# EAGLE board PANNEL_Final (EAGLE 8.6.0)
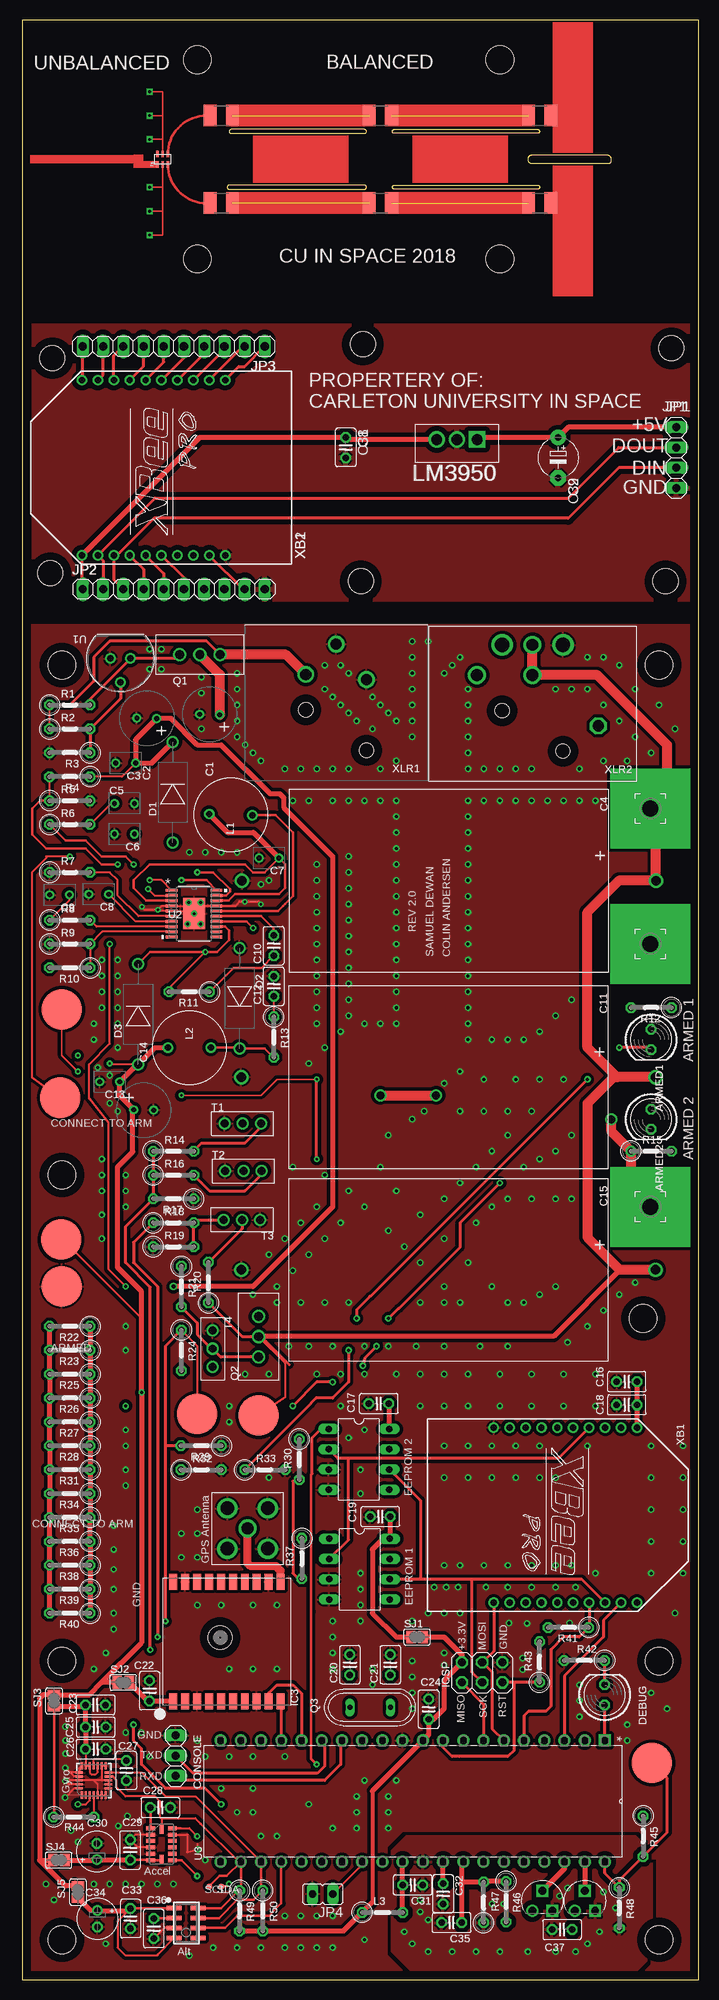
[diagram p0: board, top side]
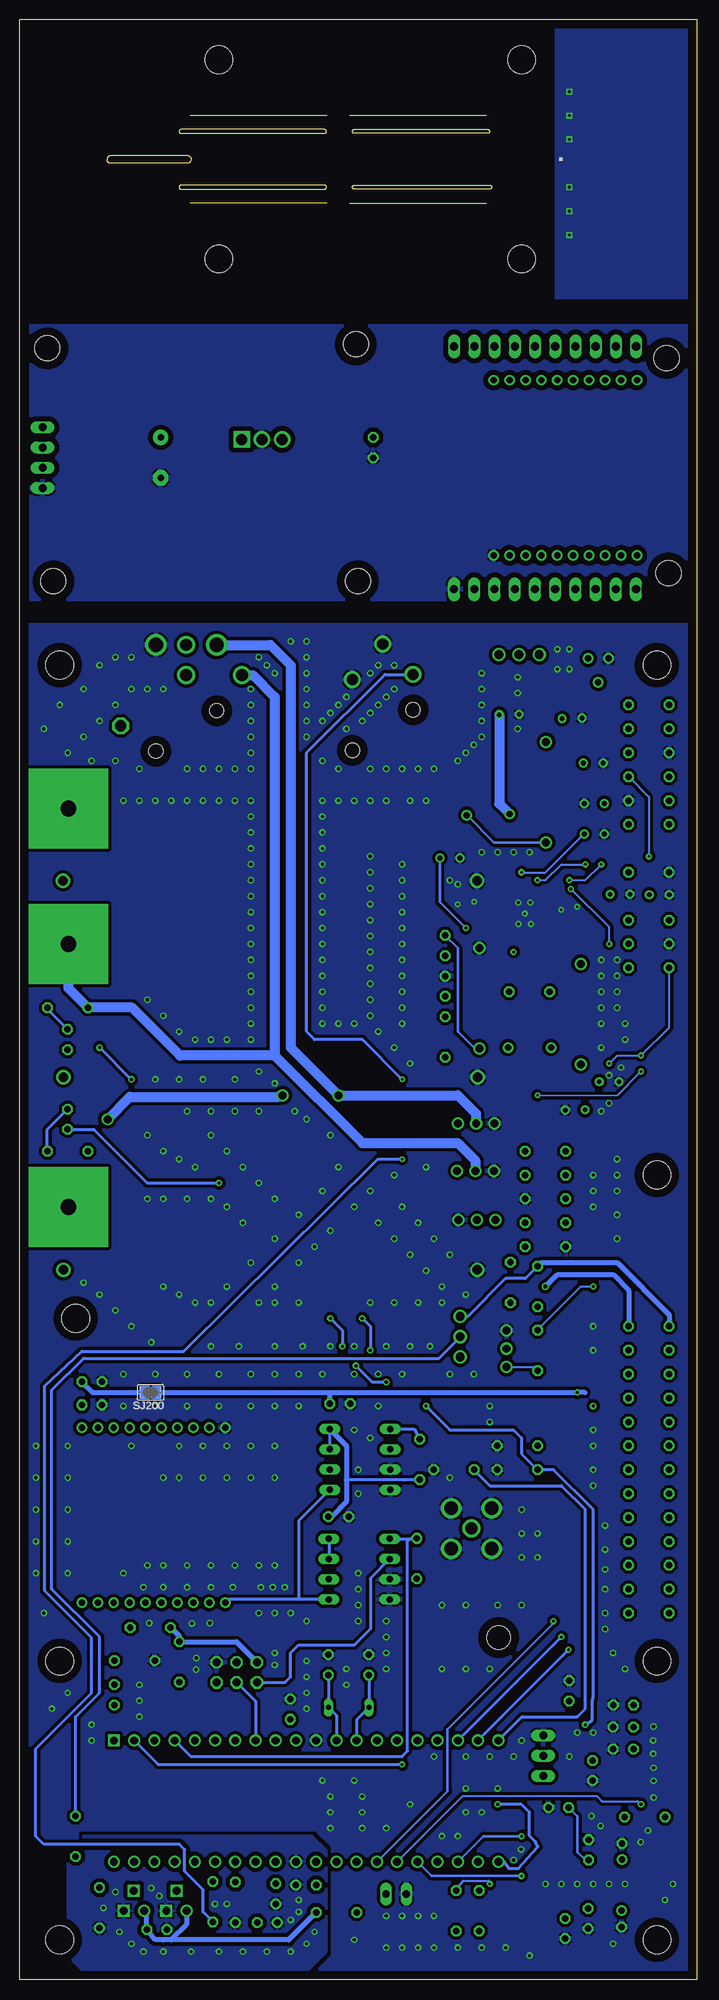
[diagram p1: board, bottom side, seen from below]

Size 85 x 246 mm. Coordinates in mm from the lower left corner, seen from the top.
Outline: 0,0 85,0 85,246 0,246 0,0
Copper layers (1*16): Top 0.035mm / dielectric 1.5mm / Bottom 0.035mm
Design rules "default": minimum track width 6mil, minimum drill 0.35mm, track to track 6mil, track to pad 6mil, pad to pad 6mil, via to via 6mil, smd to smd 6mil, copper to edge 40mil, drill to drill 6mil, minimum pad ring 10mil, minimum via ring 8mil, stop-mask expansion 4mil, vias tented up to drill 0mil, thermal gap 10mil
Holes 3.5 mm at 80,40 78,83 5,5 80,165 5,165 5,101 5,40 80,5 22,241 22,216 60,216 60,241
Holes 3.17 mm at 3.79,203.54 80.8,175.54 81.55,204.79 3.54,176.54 42.8,205.29 42.55,175.54
Milling: area 63.5,228 to 74,229; area 46.5,224.8 to 65,225.2; area 46.5,231.8 to 65,232.2; area 25.8,224.8 to 43.2,225.2; area 26,231.8 to 43.2,232.2

## Footprints (pad centres in the part's own frame; a part is rotated, then mirrored left to right if it is on the bottom)
LED5MM = drill 0.813 octagon: A -1.27,0; K 1.27,0
2.5MM_AL_CAP = drill 0.6: 1 0.05,1.25; 2 0,-1.25
2.5MM_CAP = drill 0.6: 1 0.75,1.3; 2 3.25,1.3
338TTA035M = drill 1.2: + 11.5,46; - 11.5,-6
C025-025X050 = drill 0.813 octagon: 1 -1.27,0; 2 1.27,0
E2-5 = drill 0.813 pad 1.27: + -1.016,0 | drill 0.813 pad 1.27 octagon: - 1.016,0
E5-5 = drill 0.813 pad 1.905: + -2.54,0 | drill 0.813 pad 1.905 octagon: - 2.54,0
1X03 = drill 1.016 long: 1 -2.54,0; 2 0,0; 3 2.54,0
11.6MM_D = drill 1: 1 6.3,0; 2 -6.3,0
DIL8 = drill 0.813 long: 1 -3.81,-3.81; 2 -1.27,-3.81; 3 1.27,-3.81; 4 3.81,-3.81; 5 3.81,3.81; 6 1.27,3.81; 7 -1.27,3.81; 8 -3.81,3.81
FGPMMOPA6H = smd 2 x 1: P$1 -7.5,6.75; P$2 -7.5,5.25; P$3 -7.5,3.75; P$4 -7.5,2.25; P$5 -7.5,0.75; P$6 -7.5,-0.75; P$7 -7.5,-2.25; P$8 -7.5,-3.75; P$9 -7.5,-5.25; P$10 -7.5,-6.75; P$11 7.5,-6.75; P$12 7.5,-5.25; P$13 7.5,-3.75; P$14 7.5,-2.25; P$15 7.5,-0.75; P$16 7.5,0.75; P$17 7.5,2.25; P$18 7.5,3.75; P$19 7.5,5.25; P$20 7.5,6.75 | hole 3: 0.5,0.85
QFN24_0P5_4X4_ASYM_EXP = smd 0.914 x 0.279: 1 -1.84,1.5; 2 -1.84,1; 3 -1.84,0.5; 4 -1.84,0; 5 -1.84,-0.5; 6 -1.84,-1; 7 -1.84,-1.5; 13 1.84,-1.5; 14 1.84,-1; 15 1.84,-0.5; 16 1.84,0; 17 1.84,0.5; 18 1.84,1; 19 1.84,1.5 | smd 0.279 x 0.914: 8 -1,-1.84; 9 -0.5,-1.84; 10 0,-1.84; 11 0.5,-1.84; 12 1,-1.84; 20 1,1.84; 21 0.5,1.84; 22 0,1.84; 23 -0.5,1.84; 24 -1,1.84
LGA14R80P1X6_300X500X100 = smd 1.118 x 0.508: 1 -1.372,2.007; 2 -1.372,1.194; 3 -1.372,0.406; 4 -1.372,-0.406; 5 -1.372,-1.194; 6 -1.372,-2.007; 8 1.372,-2.007; 9 1.372,-1.194; 10 1.372,-0.406; 11 1.372,0.406; 12 1.372,1.194; 13 1.372,2.007 | smd 0.508 x 1.118: 7 0,-1.88; 14 0,1.88
LGA8 = smd 1.9 x 0.6: P$1 -1.5,1.875; P$2 -1.5,0.625; P$3 -1.5,-0.625; P$4 -1.5,-1.875; P$5 1.5,-1.875; P$6 1.5,-0.625; P$7 1.5,0.625; P$8 1.5,1.875
2X03 = drill 1.016 octagon: 1 -2.54,-1.27; 2 -2.54,1.27; 3 0,-1.27; 4 0,1.27; 5 2.54,-1.27; 6 2.54,1.27
1X04 = drill 1.016 long: 1 -3.81,0; 2 -1.27,0; 3 1.27,0; 4 3.81,0
1X10 = drill 1.016 long: 1 -11.43,0; 2 -8.89,0; 3 -6.35,0; 4 -3.81,0; 5 -1.27,0; 6 1.27,0; 7 3.81,0; 8 6.35,0; 9 8.89,0; 10 11.43,0
JP1 = drill 0.914 long: 1 0,-1.27; 2 0,1.27
5.4MM_L = drill 0.8: 1 0,2.7; 2 0,-2.7
0207/5V = drill 0.813 octagon: 1 -2.54,0; 2 2.54,0
TO254P470X1016X2222-3P = drill 1.372 square: 1 -5.08,-1.016 | drill 1.372: 2 -2.54,-1.016; 3 0,-1.016
3,81/1,4 = drill 2 pad 10 square: 1 0,0
PMOS = drill 1.1: 1 -2.54,0; 2 0,0; 3 2.54,0
QS = drill 0.61 long: 1 -2.54,0; 2 2.54,0
TO127P254X533-3 = drill 0.991: 1 -2.54,-2.54 | drill 0.991 square: 2 -1.27,0; 3 0,-2.54
R3225 = smd 1.6 x 2.7: 1 -1.4,0; 2 1.4,0
PAD.03X.03 = smd 0.762 x 0.762: P$1 0,0
SJ = smd 1.168 x 1.6: 1 -0.762,0; 2 0.762,0
NPNDARL = drill 1: 1 -2.3,0; 2 0,0; 3 2.3,0
BALUN = smd 0.8 x 0.3: 1 0.4,1.45; 2 0.4,0.8; 3 0.4,0.15; 4 1.7,0.15; 5 1.7,0.8; 6 1.7,1.45
LP3 = drill 0.813: 1 -2.54,0; 2 -1.27,3; 3 0,0
TSSOP-20_FE/CB = smd 1.473 x 0.356: 1 -2.819,2.926; 2 -2.819,2.276; 3 -2.819,1.626; 4 -2.819,0.975; 5 -2.819,0.325; 6 -2.819,-0.325; 7 -2.819,-0.975; 8 -2.819,-1.626; 9 -2.819,-2.276; 10 -2.819,-2.926; 11 2.819,-2.926; 12 2.819,-2.276; 13 2.819,-1.626; 14 2.819,-0.975; 15 2.819,-0.325; 16 2.819,0.325; 17 2.819,0.975; 18 2.819,1.626; 19 2.819,2.276; 20 2.819,2.926 | smd 2.743 x 3.861: EPAD 0,0
DIP254P1524X483-40 = drill 0.991 square: 1 -15.24,48.26 | drill 0.991: 2 -15.24,45.72; 3 -15.24,43.18; 4 -15.24,40.64; 5 -15.24,38.1; 6 -15.24,35.56; 7 -15.24,33.02; 8 -15.24,30.48; 9 -15.24,27.94; 10 -15.24,25.4; 11 -15.24,22.86; 12 -15.24,20.32; 13 -15.24,17.78; 14 -15.24,15.24; 15 -15.24,12.7; 16 -15.24,10.16; 17 -15.24,7.62; 18 -15.24,5.08; 19 -15.24,2.54; 20 -15.24,0; 21 0,0; 22 0,2.54; 23 0,5.08; 24 0,7.62; 25 0,10.16; 26 0,12.7; 27 0,15.24; 28 0,17.78; 29 0,20.32; 30 0,22.86; 31 0,25.4; 32 0,27.94; 33 0,30.48; 34 0,33.02; 35 0,35.56; 36 0,38.1; 37 0,40.64; 38 0,43.18; 39 0,45.72; 40 0,48.26
TEST = smd 5.08 x 5.08: P$1 0,0
132134RP = drill 1.5: 0 0,0 | drill 1.7: 1 -2.54,2.54; 2 -2.54,-2.54; 3 2.54,-2.54; 4 2.54,2.54
XBEE-PRO = drill 0.8 pad 1.27: 1 -11,9; 2 -11,7; 3 -11,5; 4 -11,3; 5 -11,1; 6 -11,-1; 7 -11,-3; 8 -11,-5; 9 -11,-7; 10 -11,-9; 11 11,-9; 12 11,-7; 13 11,-5; 14 11,-3; 15 11,-1; 16 11,1; 17 11,3; 18 11,5; 19 11,7; 20 11,9
NC3FAH1 = drill 1.4: 1 -3.81,-12.7; 2 3.81,-13.335; 3 0,-17.15 | hole 1.8: -3.81,-3.81; 3.81,-8.89
NC5FAH = drill 1.5: 1 0,-13.34; 2 0,-17.15; 3 6.98,-13.34 | drill 1.8: 4 3.81,-17.15; 5 -3.81,-17.15 | drill 1.4 octagon: NC -8.25,-6.98 | hole 1.8: -3.81,-3.81; 3.81,-8.89

## Placement (x,y rotation side)
ARMED1  RED  [LED5MM]  79,118 270 top
ARMED2  RED  [LED5MM]  79,108 270 top
C1  22µF  [2.5MM_AL_CAP]  23.55,158.83 270 top
C2  22µF  [2.5MM_AL_CAP]  15.65,158.35 270 top
C3  10 uF  [2.5MM_CAP]  15,154 180 top
C4  338TTA035M  [338TTA035M]  33.6,149.44 270 top
C5  1nF  [2.5MM_CAP]  10.86,146.34 0 top
C6  10nF  [2.5MM_CAP]  14.85,145.09 180 top
C7  10 uF  [2.5MM_CAP]  33,142.1 180 top
C8  10nF  [2.5MM_CAP]  11.63,137.54 180 top
C9  1nF  [2.5MM_CAP]  6.7,137.47 180 top
C10  0.1µF  [C025-025X050]  31.6,129.8 90 top
C11  338TTA035M  [338TTA035M]  33.53,124.79 270 top
C12  SNUB  [C025-025X050]  31.6,124.7 90 top
C13  10 uF  [2.5MM_CAP]  13,114 180 top
C14  22µF  [2.5MM_AL_CAP]  15.26,109.15 90 top
C15  338TTA035M  [338TTA035M]  33.55,100.59 270 top
C16  1µF  [C025-025X050]  75.94,75.05 180 top
C17  0.1µF  [C025-025X050]  44.8,72.3 180 top
C18  47pF  [C025-025X050]  75.94,72.14 180 top
C19  0.1µF  [C025-025X050]  44.98,58.1 180 top
C20  27pF  [C025-025X050]  41.17,39.52 90 top
C21  27pF  [C025-025X050]  46.25,39.52 90 top
C22  0.1µF  [C025-025X050]  16.01,36.26 270 top
C23  0.1µF  [C025-025X050]  9.2,34.48 0 top
C24  2.2µF  [C025-025X050]  51.05,33.94 90 top
C25  0.1µF  [C025-025X050]  9.23,31.7 0 top
C26  0.1µF  [C025-025X050]  9.23,28.92 0 top
C27  0.1µF  [C025-025X050]  13.09,26.24 270 top
C28  0.1µF  [C025-025X050]  17.36,21.6 0 top
C29  0.1µF  [C025-025X050]  13.57,16.28 90 top
C30  10µF  [E2-5]  9.39,16.08 90 top
C31  0.1µF  [C025-025X050]  49.06,11.88 180 top
C32  0.1µF  [C025-025X050]  52.87,10.76 270 top
C33  0.1µF  [C025-025X050]  13.62,7.65 270 top
C34  10µF  [E2-5]  9.46,7.63 270 top
C35  0.1µF  [C025-025X050]  53.94,7.15 180 top
C36  0.1µF  [C025-025X050]  16.52,6.4 270 top
C37  0.1µF  [C025-025X050]  67.81,6.29 0 top
C38  1µF  [C025-025X050]  40.64,192.32 270 top
C39  10µF  [E5-5]  67.31,191.05 270 top
CONSOLE  [1X03]  19.27,28.1 90 top
D1  [11.6MM_D]  18.92,149.05 90 top
D2  [11.6MM_D]  27.31,123.18 270 top
D3  [11.6MM_D]  14.57,121.19 90 top
DEBUG  [LED5MM]  73.16,35.74 90 top
IC1  25LC1024-I/P  [DIL8]  42.3,65.3 270 top
IC2  25LC1024-I/P  [DIL8]  42.38,51.52 270 top
IC3  FGPMMOPA6H  [FGPMMOPA6H]  25.72,42.43 90 top
IC4  FXAS21000  [QFN24_0P5_4X4_ASYM_EXP]  9,25 90 top
IC5  ADXL343BCCZ  [LGA14R80P1X6_300X500X100]  17.5,17 0 top
IC6  MPL3115A2LGA  [LGA8]  20.6,7.1 0 top
ICSP  [2X03]  57.78,38.56 0 top
JP1  [1X04]  82.15,191.05 90 top
JP2  [1X10]  19.05,174.54 0 top
JP3  [1X10]  19.05,205.02 180 top
JP4  [JP1]  37.75,10.75 90 top
L1  18µH  [5.4MM_L]  26.19,146.24 88.5 top
L2  18µH  [5.4MM_L]  21,117 270 top
L3  10µH  [0207/5V]  45.25,8.44 0 top
LM3950  LM3940IT-3.3  [TO254P470X1016X2222-3P]  52.07,192.32 180 top
PAD1  [3,81/1,4]  78.9,147 0 top
PAD2  [3,81/1,4]  78.9,130 0 top
PAD3  [3,81/1,4]  78.9,97 0 top
Q1  FQP7P06  [PMOS]  22.32,166.32 0 top
Q2  FQP7P06  [PMOS]  29.7,80.7 90 top
Q3  12MHz  [QS]  43.71,34.17 180 top
Q4  MCP9700A-E/TO  [TO127P254X533-3]  66.61,11.16 0 top
Q5  MCP9700A-E/TO  [TO127P254X533-3]  71.96,11.16 0 top
R1  3.65 kΩ  [0207/5V]  6,160 0 top
R2  1 MΩ  [0207/5V]  6,157 0 top
R3  1 MΩ  [0207/5V]  6,154 180 top
R4  51.1 kΩ  [0207/5V]  6,151 180 top
R5  373.65 kΩ  [0207/5V]  6,148 0 top
R6  24.9 kΩ  [0207/5V]  6,145 0 top
R7  8.06 kΩ  [0207/5V]  6,139 0 top
R8  24.9 kΩ  [0207/5V]  6,133 0 top
R9  17.4 kΩ  [0207/5V]  6,130 0 top
R10  51.1 kΩ  [0207/5V]  6,127 180 top
R11  BOOSTR  [0207/5V]  21,124 180 top
R12  1.2 k  [0207/5V]  79,122 180 top
R13  SNUB  [0207/5V]  31.6,118.3 270 top
R14  3.6k  [0207/5V]  19,104 0 top
R15  1.2 k  [0207/5V]  79,104 0 top
R16  3.6 k  [0207/5V]  19,101 0 top
R17  1 M  [0207/5V]  19,98 180 top
R18  3.6 K  [0207/5V]  19,95 0 top
R19  1 M  [0207/5V]  19,92 0 top
R20  1.4 k  [0207/5V]  23.4,87.5 90 top
R21  [0207/5V]  20,87 270 top
R22  [0207/5V]  6,82 180 top
R23  [0207/5V]  6,79 180 top
R24  [0207/5V]  20,79 270 top
R25  [0207/5V]  6,76 180 top
R26  [0207/5V]  6,73 180 top
R27  [0207/5V]  6,70 180 top
R28  [0207/5V]  6,67 180 top
R29  2M Ω  [0207/5V]  22.5,67 180 top
R30  1MΩ  [0207/5V]  34.8,65.3 270 top
R31  [0207/5V]  6,64 180 top
R32  1.2 k  [0207/5V]  22.5,64 0 top
R33  1.2k  [0207/5V]  30.5,64 0 top
R34  [0207/5V]  6,61 180 top
R35  [0207/5V]  6,58 180 top
R36  [0207/5V]  6,55 180 top
R37  1MΩ  [0207/5V]  35.14,52.85 270 top
R38  [0207/5V]  6,52 180 top
R39  [0207/5V]  6,49 180 top
R40  [0207/5V]  6,46 180 top
R41  1MΩ  [0207/5V]  68.61,44.2 180 top
R42  1KΩ  [0207/5V]  70.61,40.06 180 top
R43  10kΩ  [0207/5V]  64.97,39.86 90 top
R44  47kΩ  [0207/5V]  6.5,20.43 0 top
R45  [0207/5V]  78,18 270 top
R46  47kΩ  [0207/5V]  60.76,9.79 270 top
R47  47kΩ  [0207/5V]  57.95,9.69 90 top
R48  [0207/5V]  75,9 270 top
R49  2k2Ω  [0207/5V]  27.31,8.64 270 top
R50  2k2Ω  [0207/5V]  30.22,8.64 270 top
R51  [R3225]  25,234 0 top
R52  [R3225]  25,223 0 top
R53  [R3225]  45,234 0 top
R54  [R3225]  65,234 0 top
R55  [R3225]  65,223 0 top
R56  [R3225]  45,223 0 top
SCL  TEST-POINT3  [PAD.03X.03]  23.5,11.7 0 top
SDA  TEST-POINT3  [PAD.03X.03]  25,11.7 0 top
SJ1  [SJ]  49.6,43 0 top
SJ2  [SJ]  12.7,37.3 0 top
SJ3  [SJ]  4,35 270 top
SJ4  [SJ]  4.6,15 0 top
SJ5  [SJ]  7,11 270 top
SJ200  [SJ]  68.6,73.7 180 bottom
T1  [NPNDARL]  27.7,107.47 0 top
T2  [NPNDARL]  27.8,101.51 0 top
T3  [NPNDARL]  27.6,95.35 180 top
T4  [NPNDARL]  23.9,79.2 270 top
T5  BALUN  [BALUN]  18.45,227.45 90 top
U1  TL431BQLP  [LP3]  11.09,165.83 180 top
U2  LT3570EFEPBF  [TSSOP-20_FE/CB]  21.59,133.81 0 top
U3  ATMEGA1284P-PU  [DIP254P1524X483-40]  24.93,14.77 270 top
U$1  BAT+  [TEST]  5,121.8 0 top
U$2  +24V  [TEST]  4.8,110.7 0 top
U$3  +3.3V  [TEST]  4.9,92.9 0 top
U$4  CAP  [TEST]  5,87 0 top
U$5  TEST  [TEST]  22,71 0 top
U$6  CAP  [TEST]  29.7,70.8 0 top
U$7  TEST  [TEST]  79.1,27.2 90 top
X1  132134RP  [132134RP]  28.31,56.62 0 top
XB1  XBEE-PRO  [XBEE-PRO]  68.22,58.3 270 top
XB2  XBEE-PRO  [XBEE-PRO]  16.51,189.78 90 top
XLR1  NC3FAH1  [NC3FAH1]  39.44,150.5 180 top
XLR2  NC5FAH  [NC5FAH]  64.11,150.4 180 top

## Library data of the parts
ARMED1 ARMED2 DEBUG = led
C1-C9 C11 C13-C15 D1-D3 L1 L2 PAD1-PAD3 Q1 Q2 T1-T4 U$1-U$7 XLR1 XLR2 = Power
C10 C12 C16-C39 = rcl; SPICEPREFIX: C
CONSOLE ICSP JP1-JP3 = pinhead
IC1 IC2 = microchip; MF: MICROCHIP; MPN: 25LC080/P; OC_FARNELL: 1556143; OC_NEWARK: 92C7440
IC3 IC6 = microbuilder
IC4 = Freescale_Sensors_v2
IC5 = CU in Space; MPN: ADXL343BCCZ; OC_FARNELL: 2191716; OC_NEWARK: 90T1358; PACKAGE: 14LGA; SUPPLIER: ANALOG DEVICES
JP4 SJ1-SJ5 SJ200 = jumper
L3 = rcl; SPICEPREFIX: L
LM3950 = CU-InSpace_Ground; MPN: LM3940IT-3.3; OC_FARNELL: 9494553; OC_NEWARK: 41K5126; PACKAGE: TO-220; SUPPLIER: NATIONAL SEMICONDUCTOR
Q3 = special
Q4 Q5 = CU in Space; MPN: MCP9700A-E/TO; OC_FARNELL: 1332164; OC_NEWARK: 17M0676; PACKAGE: TO-92-3; SUPPLIER: Microchip
R1-R50 = rcl; SPICEPREFIX: R
R51-R56 = adafruit
SCL SDA = SparkFun-Connectors
T5 X1 = CU in Space
U1 = Power; MANUFACTURER_PART_NUMBER: TL431BQLP; VENDOR: Texas Instruments
U2 = Power; MANUFACTURER_PART_NUMBER: lt3570efe#pbf; VENDOR: Linear Technology
U3 = Atmel_By_element14_Batch_1-00; MPN: ATMEGA1284P-PU; OC_FARNELL: 1715481; OC_NEWARK: 15R0264; PACKAGE: PDIP-40; SUPPLIER: Atmel
XB1 = xbee; MPN: XBP24-AWI-001; OC_FARNELL: 1337916; OC_NEWARK: 42M2667
XB2 = maxstream; MPN: XBP24-AWI-001; OC_FARNELL: 1337916; OC_NEWARK: 42M2667

## Nets
12V_ENABLE: R24.1 R29.2 U2.2 U3.27 U$5.P$1
+3V3: C38.1 JP2.1 LM3950.3 XB2.1
+5V: C39.+ JP1.4 LM3950.1
+12.0: C2.1 C3.1 D1.1 R4.1 R22.1 R23.1 R25.1 R26.1 R27.1 R28.1 R31.1 R34.1 R35.1 R36.1 R38.1 R39.1 R40.1 U$2.P$1
A_GND: C31.1 C32.2 C35.2 C37.1 Q4.3 Q5.3 R47.1 R48.2 U3.31
ACCEL_INT: IC5.8 U3.25
ALT_INT: IC6.P$6 U3.24
AREF: C32.1 U3.32
ASSOC: JP3.5 XB2.15
ATTN: JP3.9 XB2.19
AVCC: C31.2 C37.2 L3.2 Q4.1 Q5.1 U3.30
BAT+: Q1.3 R1.1 R2.1 R46.2 U$1.P$1 XLR1.2
BAT_REF: C35.1 R46.1 R47.2 U3.33
CAP_DISCHARGE: R18.1 U3.18
CAP_REF: R45.2 R48.1 U3.40 U$7.P$1
CS: JP3.7 XB2.17
CTS: JP3.2 XB2.12
DEBUG_LED: DEBUG.A U3.1
DIN: JP1.2 JP2.3 XB2.3
DIO0: JP3.10 XB2.20
DOUT: JP1.3 JP2.2 XB2.2
DTR: JP2.9 XB2.9
EEPROM2_CS: IC1.1 R30.1 U3.2
EEPROM_CS: IC2.1 R37.1 U3.4
EMATCH_SENSE_1: ARMED1.K R33.1 U3.20
EMATCH_SENSE_2: ARMED2.K R32.1 U3.21
FB1: R4.2 R5.1 U2.1
GND: C1.2 C2.2 C3.2 C4.- C5.2 C6.2 C7.2 C8.2 C9.2 C11.- C12.2 C13.2 C14.2 C15.- C16.2 C17.2 C18.2 C19.2 C20.2 C21.2 C22.1 C23.2 C24.2 C25.2 C26.2 C27.2 C28.2 C29.2 C30.- C33.2 C34.- C36.2 CONSOLE.3 D2.2 IC1.3 IC1.4 IC2.3 IC2.4 IC3.P$3 IC3.P$8 IC3.P$12 IC3.P$19 IC4.1 IC4.5 IC4.6 IC4.7 IC4.8 IC4.9 IC4.10 IC4.13 IC4.14 IC4.19 IC4.20 IC4.21 IC4.22 IC4.23 IC4.24 IC5.2 IC5.4 IC5.5 IC5.12 IC6.P$3 ICSP.6 JP4.2 R3.2 R5.2 R7.1 R9.1 R17.1 R19.1 R29.1 R32.2 R33.2 R42.2 T1.1 T2.1 T3.1 T4.1 U1.3 U2.4 U2.5 U2.17 U2.EPAD U3.11 U$4.P$1 X1.1 X1.2 X1.3 X1.4 XB1.10 XLR1.1 XLR1.3 XLR2.5
GND1: C38.2 C39.- JP1.1 JP2.10 LM3950.2 XB2.10
GND2: T5.2 T5.5
GPS_FIX: IC3.P$5
GYRO_INT: IC4.3 U3.26
MAIN_TRIGGER: R14.1 R16.1 R17.2 U3.19
MISO: IC1.2 IC2.2 ICSP.1 U3.7 XB1.4
MISO1: JP2.4 XB2.4
MOSI: IC1.5 IC2.5 ICSP.4 U3.6 XB1.11
MOSI1: JP3.1 XB2.11
N$1: C27.1 IC4.16
N$2: IC4.4 R44.2
N$3: C36.1 IC6.P$2
N$4: IC3.P$11 X1.0
N$5: C8.1 U2.7
N$6: R7.2 U2.6
N$7: R8.2 U2.8
N$8: D1.2 L1.2 U2.16
N$9: C5.1 R6.2
N$10: C9.1 R8.1
N$11: R6.1 U2.20
N$12: C6.1 U2.19
N$13: C10.2 D2.1 L2.1 R13.2 U2.15
N$15: R9.2 R10.1 U2.9
N$16: D3.1 R11.2 U2.13
N$30: Q2.3 R21.1 R22.2 R23.2 R25.2 R26.2 R27.2 R28.2 R31.2 R34.2 R35.2 R36.2 R38.2 R39.2 R40.2
N$31: Q2.1 R21.2 T4.2
N$33: JP2.8
N$34: R20.2 T3.2
N$35: R24.2 T4.3
N$67: C12.1 R13.1
N$69: Q1.1 R1.2 U1.1
N$70: R2.2 R3.1 U1.2
N$71: DEBUG.K R42.1
N$75: C10.1 R11.1
N$77: PAD3.1 R15.1 T1.2 XLR2.4
N$78: PAD2.1 R12.2 T2.2 XLR2.3
N$79: R16.2 T2.3
N$80: R14.2 T1.3
N$81: C4.+ C11.+ C15.+ PAD1.1 Q2.2 R20.1 R45.1 U$6.P$1 XLR2.1 XLR2.2
N$82: R18.2 R19.2 T3.3
N$83: R53.2 R54.1
N$84: ARMED2.A R15.2
N$85: ARMED1.A R12.1
N$86: R51.2 R53.1
N$87: R52.2 R56.1
N$88: R55.1 R56.2
N$89: R52.1 T5.3
N$90: R51.1 T5.4
N$91: R54.2
N$92: R55.2
N$93: T5.1
N$95: JP4.1 U3.28
PWM0: JP2.6 XB2.6
PWM1: JP2.7
PWR_JUNC: C1.1 C7.1 L1.1 Q1.2 U2.3 U2.14 U2.18
RADIO_CS: R41.1 U3.5 XB1.17
RADIO_INT: U3.3 XB1.19
RESET: ICSP.5 R43.1 U3.9
RESET1: JP2.5 XB2.5
RTS: JP3.6 XB2.16
RXD0: CONSOLE.1 U3.14
RXD1: IC3.P$9 U3.16
SCK: IC1.6 IC2.6 ICSP.3 U3.8 XB1.18
SCK1: JP3.8 XB2.18
SCL: IC4.11 IC5.14 IC6.P$8 R49.1 SCL.P$1 U3.22
SDA: IC4.12 IC5.13 IC6.P$7 R50.1 SDA.P$1 U3.23
SLEEP: JP3.3 XB2.13
TEMP: Q5.2 U3.39
TEMP2: Q4.2 U3.38
TXD0: CONSOLE.2 U3.15
TXD1: IC3.P$10 U3.17
VCC: C13.1 C14.1 C17.1 C19.1 D3.2 IC1.7 IC1.8 IC2.7 IC2.8 L2.2 R10.2 R30.2 R37.2 SJ1.1 SJ2.1 SJ3.1 SJ4.1 SJ5.1 SJ200.1 U$3.P$1
VCC_ACCEL: C28.1 C29.1 C30.+ IC5.1 IC5.6 IC5.7 SJ4.2
VCC_ALT: C33.1 C34.+ IC6.P$1 IC6.P$4 SJ5.2
VCC_GPS: C22.2 IC3.P$1 SJ2.2
VCC_GYRO: C23.1 C25.1 C26.1 IC4.15 IC4.17 IC4.18 R44.1 SJ3.2
VCC_MCU: C24.1 ICSP.2 L3.1 R41.2 R43.2 R49.2 R50.2 SJ1.2 U3.10
VCC_XB: C16.1 C18.1 SJ200.2 XB1.1
VREF: JP3.4 XB2.14
XTAL1: C20.1 Q3.2 U3.13
XTAL2: C21.1 Q3.1 U3.12

## Tracks (layer width: path | path; a pad name or v marks a point on that pad's centre or on a via)
12V_ENABLE  (via drill 0.35)
  Top 0.254: v15.8,136.9 16.61,136.09 U2.2 | R24.1 22,79.54 U$5.P$1 | v11,130 11,117.5 8.4,114.9 8.4,110.6 10.82,107.58 10.82,89.18 v13,87
  Top 0.406: v18,45 18,67 | 18,67 18,79.54 R24.1 | R29.2 18,67
  Bottom 0.254: R24.1 14.54,87 v13,87 | v11,130 11,132.1 v15.8,136.9
  Bottom 0.305: U3.27 31.3,23.64 31.3,31.4 18,44.7 v18,45
+3V3
  Top 0.406: XB2.1 7.51,174.65 JP2.1
  Top 0.61: LM3950.3 40.89,193.34 C38.1 22.32,193.59 XB2.1
+5V
  Top 0.61: JP1.4 68.58,194.86 C39.+ 57.4,193.59 LM3950.1
+12.0  (via drill 0.35, 0.5)
  Top 0.254: C3.1 12.55,151 R4.1 | v6,141 3,141 3,140.77 1.22,138.99 1.22,113.28 U$2.P$1
  Top 0.61: R22.1 R23.1 R25.1 R26.1 R27.1 R28.1 R31.1 R34.1 R35.1 R36.1 R38.1 R39.1 R40.1 | D1.1 16.27,152.7 C3.1 14.25,155.64 C2.1 18.7,158.3 22,155 25,155 31.14,148.86 32.36,148.86 32.86,148.36 32.86,147.14 39,141 39,97 29,87 v19,87
  Bottom 0.254: R4.1 6,148.46 v6,141
  Bottom 0.61: v19,87 17.5,88.5 10.5,88.5 8.54,86.54 R22.1
A_GND  (via drill 0.4)
  other vias: 57,3.5 54,3.5 51,3.5 49,4.5 51,7.5 50,8.5 59,9.5 60.5,9.5 60,3.5 63.5,3.5 67,3.5 69.5,3.5 71,4.5 72.5,6 74.5,9 73,11 68.5,11.5 67.5,10.5 50,10 48,6
  pour Bottom (isolate 0.508): 49,1 46.5,3.5 46.5,16.2 48.3,18 49,18 77,18 79,16 79,3 77,1
  pour Bottom (isolate 0.61): 49,1 46.5,3.5 46.5,16.2 48.3,18 77,18 79,16 79,3 77,1
  pour Top (isolate 0.61): 49,1 46.5,3.5 46.5,16.2 48.3,18 77,18 79,16 79,3 77,1
ACCEL_INT  (via drill 0.35)
  Top 0.305: v22,13 20.01,14.99 IC5.8
  Bottom 0.305: U3.25 33.32,13 v22,13
ALT_INT
  Top 0.305: IC6.P$6 25.48,6.47 27,8 31,8 32.55,9.55 U3.24
AREF
  Top 0.61: C32.1 U3.32
ASSOC
  Top 0.406: XB2.15 20.32,203.59 JP3.5
ATTN
  Top 0.406: XB2.19 10.16,201.43 JP3.9
AVCC
  Top 0.61: L3.2 C31.2 U3.30
  Bottom 0.61: L3.2 51.25,4.97 66,4.97 | 66,4.97 67,4.97 67.03,5 68,5 68,5.01 C37.2 69.08,8.28 Q5.1 | Q4.1 64.07,6.9 66,4.97
BAT+  (via drill 0.3)
  Top 0.2: v37,113 32,113 30,111 v20,111 | v7,114 5,116 U$1.P$1
  Top 0.254: R2.1 R1.1
  Top 0.406: Q1.3 23.18,168 11,168 9,166 9,163 6,160 R1.1 | v37,103 v37,113
  Top 1.27: XLR1.2 33.15,166.32 Q1.3
  Bottom 0.2: v20,111 10,111 v7,114
  Bottom 0.406: R46.2 62,8.49 62,11.3 64.3,13.6 64.3,16.3 65,17 82,17 83,18 83,29 76,36 76,42.91 81.86,48.77 81.86,74.53 77.23,78.86 64.44,78.86 40,103 v37,103 | v37,113 42,118 48,118 49,119 49,154 39.16,163.84 XLR1.2
BAT_REF
  Top 0.61: R46.1 58.05,12.33 R47.2 55.44,12.23 55.21,12 | C35.1 55.21,12 | 55.21,12 55.21,14.57 U3.33
CAP_DISCHARGE  (via drill 0.35)
  Top 0.406: R18.1 14,92.54 14,90 17,87 v17,43
  Bottom 0.406: U3.18 18.02,42 | 18.02,42 18,42 | 18.02,42 17.02,43 v17,43
CAP_REF
  Top 0.406: U3.40 73.19,13.35 R48.1 75,12.46 R45.2 81,18.46 81,25.3 U$7.P$1
CS
  Top 0.406: XB2.17 15.24,202.51 JP3.7
CTS
  Top 0.406: XB2.12 27.75,205.02 JP3.2
DEBUG_LED
  Top 0.406: U3.1 73.16,30.04 DEBUG.A
DIN
  Top 0.406: XB2.3 11.51,178.35 | 11.51,178.35 11.51,175.73 JP2.3 | JP1.2 74.93,189.78 68.58,183.43 16.59,183.43 11.51,178.35
DIO0
  Top 0.406: XB2.20 7.62,200.89 JP3.10
DOUT
  Top 0.406: JP2.2 10.16,178.13 XB2.2 16.7,185.97 68.58,185.97 74.93,192.32 JP1.3
DTR
  Top 0.406: XB2.9 27.75,174.54 JP2.9
EEPROM2_CS  (via drill 0.35)
  Top 0.305: 36.3,27.7 36.3,46.2 36.3,63.42
  Top 0.406: v37,27 36.3,27.7 | 36.3,63.42 36.42,63.54 36.42,68 | 36.42,68 36.42,68.02 | 36.42,68 37.53,69.11 IC1.1
  Bottom 0.406: IC1.1 35.47,69.11 R30.1 | U3.2 67.64,27 v37,27
EEPROM_CS
  Bottom 0.406: IC2.1 36,55.33 | 36,55.33 35.28,55.33 R37.1 | U3.4 63.56,28 37,28 36.3,28.7 36.3,55.03 36,55.33
EMATCH_SENSE_1  (via drill 0.4)
  Top 0.406: ARMED1.K 78.73,117 v75,117 | v71,113 43.76,85.76 43.69,85.76 42,84.07 v42,83 | v41,79 41,75 39,73 36.93,73 36.24,72.31 36.24,72.28 R33.1
  Bottom 0.406: U3.20 21.94,33 15,33 14,34 14,59 17,62 25.96,62 R33.1 | v75,117 v71,113 | v42,83 41,82 v41,79
EMATCH_SENSE_2  (via drill 0.4)
  Top 0.406: v60,100 55,95 55,91.93 47.31,84.24 47.24,84.24 v46,83 | v44.5,79.5 43,78 v42.8,77.04 | v39,75 37,75 v34,72 | v25,22 23,24 18,24 15,27 15,29 14,30 v14,32
  Bottom 0.406: ARMED2.K 75.73,106.73 69,100 v60,100 | v46,83 44.5,81.5 v44.5,79.5 | v42.8,77.04 40.76,75 v39,75 | v34,72 31,69 23,69 22,68 22,66 20,64 R32.1 18,64 13,59 13,35.44 13.14,35 13.14,32.56 v14,32 | U3.21 24.14,14.77 23.61,13.94 22.39,13.94 19.94,16.69 20.24,17.31 21,18.07 21,21 22,22 v25,22
FB1  (via drill 0.35)
  Top 0.254: R5.1 R4.2 | U2.1 17.51,138 v16,138
  Top 0.305: v12,140 10,140 8,142 3,142 1.25,143.75 1.25,147 2.25,148 R5.1
  Bottom 0.254: v16,138 14,138 v12,140
GND  (via drill 0.3, 0.35, 0.4)
  Top 0.152: IC4.1 5.71,23.16 v5.4,22.85
  Top 0.2: IC4.7 IC4.6 IC4.5 9.5,24.5 9,25
  Top 0.254: v20.9,135.2 20.9,134.78 U2.4 17.55,134.78 v17.05,134.29 | U2.EPAD 21.59,134.13 U2.5 17.2,134.13 v17.05,134.29 | 21.6,134.78 v21.6,133.8 | v17.05,134.29 15.4,134.29 v15.04,134.65 | 10,25 IC4.10 IC4.9 | 10,25 9,25 IC4.22 5.5,25 v5.44,24.94 5.88,24.5 IC4.23 | 10,25 IC4.14 IC4.13 | IC5.2 14.22,18.19 C29.2 14.53,16.59 IC5.4 | IC5.12 20.7,18.19 | 20.7,18.19 20.81,18.19 | 22,17 v22.05,16.35 20.7,16 20.7,18.19 | IC6.P$3 17.87,6.47 C36.2 | IC4.24 6.55,24 v5.4,22.85 | IC4.21 6.51,25.5 v5.43,26.58 6.01,26 IC4.20 7.16,26.5 IC4.19
  Top 0.305: v21.6,133.8 22.59,134.78 U2.17 26.79,134.78 27.32,135.32 v27.97,135.32 29.68,135.32 v30,135
  other vias: 22.4,135.2 22.4,132.5 20.8,132.5 61.15,44.75 63.4,44.71 62.85,40.37 62.87,38.92 11,12 13,12 15,12 17,12 19,12 23,15 5.43,31.77 5.46,28.36 5.46,30.02 6.13,18.7 7.03,17.27 12.08,19.29 13.22,20.54 13,31 15,31 16,28 22,30 23,28 26,28 29,28 33,28 27,21 29,21 30,18 32,18 36,22 43,25 42,23 42,19 39,19 70,37 70,35 70,33 46,23 47,25 46,19 46,21 79,36 81,34 76,32 76,30 42.5,51 42.5,49 42.5,47 42.5,45 39,45 39,43 39,41 39,39 44,39 44,37 49,40 49,38 53,41 53,39.5 49,36 49,34 22,47 25,47 29,47 32,47 32,39 29,39 26,39 22,53 20,53 22,56 20,56 22,59 31,63 11.5,57 11.5,54 11.5,51.5 11.5,49 11.5,46 11.5,44 10.5,41 9,39 13,62 13,64 13,67 13,69 49,45 51,46 53,46 55,46 68.75,44.75 69.5,49.25 67,49.25 64,49.25 61,49.25 58.25,49.25 54.75,49.25 53.25,49.25 51.75,49.25 53,52 55,52 58,52 61,52 64,52 67,52 69,52 72,51 39,8 37,8 35,8 33,8 43,5 39,4 37,4 35,4 33,4 30,4 27,4 24,4 21,3 43,69 41,68 42.5,64 42.5,61 53,67 56,67 59,67 62,67 65,67 71,67 67,63 65,63 59,63 53,63 62,63 56,63 79,67 83,67 83,63 79,63 79,59 83,59 83,55 79,55 83,51 79,51 82,46 26,72 26,70 28,76 31,76 37,76 40,76 40,72 39,79.5 36,79.5 33.5,79.5 29,86 32,85 35,85 38,85 41,85 43,79.5 43,76 47,76 46,79.5 50,85 49.5,79.5 50,76 50,72 53,72 53,76 53,79.5 53,85 55,85 57.5,79.5 56,76 56,72 61,85 63,85 61,79.5 68.5,80 65,86 67,87 71,82 73,84 75,86 77,87.5 59,87 53,87 56,90 53,93 50,90 48,92 50,96 47,99 46,94 43,97 45,102 41,99 38,101 34,102 46,106 49,108 50.5,109 53,112.5 55,114 56,118 56,120 56,122 56,124 56,126 56,130 56,128 36,115 38,117 40,119 43,120 45,120 47,120 47,122 47,124 47,126 47,128 47,130 47,132 56,132 56,134 56,136 56,138 56,140 56,142 56,144 56,146 56,148 47,148 47,146 47,144 47,142 47,140 47,138 47,136 47,134 34,148 36,148 39,148 41,148 43,148 45,148 58,148 60,148 72,72 72,76 68,76 68,72 64,72 60,72 60,76 64,76 62,148 64,148 66,148 68,148 70,148 72,148 71,166 70,152 64,152 62,152 60,152 58,152 56,152 56,154 56,156 56,158 56,160 56,162 67,162 69,162 71,162 73,166 75,165 77,162 80,160 82,157 79,154 77,156 75,158 73,160 73,153 76,153 53,164 54,165 55,166 51,168 49,168 49,166 49,164 49,162 49,160 49,158 49,156 47,153 45,152 41,152 39,152 37,152 35,152 33,152 30,153 29,154 28,155 27,156 16,167 17.5,167 17.5,164.5 16,164.5 22.5,163.5 22.5,161.5 27,164 27,162 27,160 27,158 22.5,157 25,24 29,24 42,21 21,141.5 23,141.5 25,141.5 27,141.5 31,138 30,137.5 10,103 10,101 13,101 13,99 10,99 10,96 13,97 10,93 13,82 13,79 12,117 9,118 9,120 12,120 12,122 10,122 12,124 10,124 12,126 10,126 10,128 12,128 9.5,114.5 11,113.5 11,110 12,109 3,12 4,10 9,12 10.5,4.5 41,121 41,123 41,125 41,127 41,129 41,131 41,141 41,139 41,137 41,135 41,133 37,120 37,122 37,124 37,126 37,128 37,130 37,140 37,138 37,136 37,134 37,132 58,113 62,113 65,113 68,113 64,109 58,109 55,109 59,118 61,118 63,118 65,119 67,121 69,123 38,165 40,165 41,164 44,161 45,160 46,159 47,158 42,158 44,157 41,159 40,160 39,161 38,162 61,109 61,106 59,104 57,102 55,100 53,98 57,95 59,97 61,98 64,98 67,98 69,98 69,106 67,104 65,103 63,102 37,97 40,95 38,93 36,91 34,89 32,87 35,95 33,93 31,91
  pour Top (isolate 0.406, rank 2): 0,0 85,0 85,170 0,170
  pour Bottom (isolate 0.406, rank 2): 0,0 85,0 85,170 0,170
GND1
  pour Top (isolate 0.61): 1.27,207.56 1.27,173.27 83.82,173.27 83.82,207.56
  pour Bottom (isolate 0.61): 1.27,207.56 1.27,173.27 83.82,173.27 83.82,207.56
GND2  (via drill 0.35)
  Top 0.16: T5.2 17.65,225 | 17.65,225 v16,225 | T5.5 17.65,231 | 17.65,231 v16,231 | 17.65,231 17.65,234 | 17.65,234 v16,234 | 17.65,234 17.65,237 v16,237 | 17.65,225 17.65,222 | 17.65,222 v16,222 | 17.65,222 17.65,219 v16,219
  pour Bottom: 0,246 17.78,246 17.78,211 0,211
GYRO_INT  (via drill 0.4)
  Top 0.254: v7,22 8,22 8.5,22.5 IC4.3
  Bottom 0.254: U3.26 29.4,23 12.5,23 11.9,22.4 7.4,22.4 v7,22
MAIN_TRIGGER  (via drill 0.35)
  Top 0.406: R14.1 R16.1 | R16.1 R17.2 13,94.54 13,90 16.1,86.9 v16.1,41.4 | R16.1 16,101
  Bottom 0.406: U3.19 16.8,40.68 16.8,40.7 v16.1,41.4
MISO
  Top 0.406: ICSP.1 57.95,34.58 U3.7 | XB1.4 67.32,65.4 41,65.4 | IC1.2 39.66,65.4 41,65.4 | IC2.2 41,55.22 41,65.4
  Bottom 0.406: ICSP.1 51.71,37.29 51,38 51,41 50,42 43,42 41,44 41,50.36 IC2.2
MISO1
  Top 0.406: XB2.4 15.24,177.05 JP2.4
MOSI
  Top 0.406: ICSP.4 57.8,39.8 | 57.8,39.8 59,38.61 59,31.5 U3.6 | XB1.11 59.22,41.22 57.8,39.8
  Bottom 0.406: IC2.5 50,47.71 | 50,47.71 58.81,47.71 XB1.11 | IC1.5 50,57.6 50,47.71
MOSI1
  Top 0.406: XB2.11 27.21,202.48 27.94,202.48 JP3.1
N$1
  Top 0.254: C27.1 12.9,27.7 9,27.7 IC4.16
N$2
  Top 0.254: IC4.4 9,20.47 R44.2
N$3
  Top 0.305: C36.1 16.58,7.72 IC6.P$2
N$4
  Top 1.016: IC3.P$11 32.47,51.33 31.9,51.9 28.7,51.9 28.3,52.3 28.31,52.31 X1.0
N$5
  Top 0.254: U2.7 14.29,132.84 C8.1
N$6
  Top 0.254: R7.2 11,139 12,138 12,136.11 14.62,133.49 U2.6
N$7
  Top 0.254: U2.8 9.36,132.18 R8.2
N$8
  Top 0.305: U2.16 27,134.13 27.38,134.13 32.13,134.13 32.75,134.75 33,135 34,136 34,144 31.83,146.17 L1.2
  Bottom 0.305: L1.2 25.47,142.75 D1.2
N$9
  Top 0.254: R6.2 11.19,147.65 C5.1
N$10
  Top 0.254: R8.1 5.95,135.49 C9.1
N$11  (via drill 0.35)
  Top 0.305: U2.20 23.14,138 v20,138 | v14,140 13,141 10,141 8,143 5.46,143 R6.1
  Bottom 0.254: v20,138 19,138 17,140 v14,140
N$12  (via drill 0.35)
  Top 0.305: U2.19 25.59,136.09 26.1,136.6 26.1,136.9 24,139 v22,139
  Bottom 0.254: v22,139 19,139 14.21,143.79 C6.1
N$13
  Top 0.254: U2.15 24.44,133.52 | 30.48,116.88 R13.2
  Top 0.305: 24.44,133.52 30,133.52 31.6,131.92 C10.2 | 30.48,116.88 D2.1 27.2,117 L2.1
  Bottom 0.305: C10.2 30,129.47 30,119 27.88,116.88 D2.1
N$15
  Top 0.254: U2.9 10.07,131.53 R9.2 R10.1
N$16  (via drill 0.35)
  Top 0.305: U2.13 25.52,132.18 26,131.7 26,130.5 24.5,129 v23,129 | R11.2 18.46,124.46 v23,129 | D3.1 16.08,129 v23,129
N$30
  Top 0.61: R22.2 R23.2 R25.2 R26.2 R27.2 R28.2 R31.2 R34.2 R35.2 R36.2 R38.2 R39.2 R40.2
  Bottom 0.406: R21.1 21.54,88 24,88 28.76,83.24 Q2.3
  Bottom 0.61: R21.1 19.54,90 10,90 3.46,83.46 R22.2
N$31
  Top 0.406: Q2.1 24.94,78.16 24.05,79.05 | 24.05,79.05 T4.2 | R21.2 22,82.46 22,81 23.95,79.05 24.05,79.05
N$34
  Top 0.406: T3.2 27.6,94.24 R20.2
  Top 0.61: T3.2 27.6,95.14
N$35
  Bottom 0.254: T4.3 20,76.9 R24.2
N$67
  Top 0.254: C12.1 R13.1
N$69
  Top 0.406: Q1.1 19.29,165.83 U1.1 8.54,160.74 R1.2
N$70
  Top 0.406: U1.2 12.36,160.82 R2.2 R3.1
N$71
  Top 0.406: DEBUG.K R42.1
N$75
  Top 0.305: C10.1 30.07,127 26.54,127 R11.1
N$77  (via drill 1)
  Top 1.27: v74,108 74,106.46 R15.1 76.46,99.44 PAD3.1 | v45,111 v52,111
  Bottom 1.27: XLR2.4 53.55,167.55 51,165 51,117 v45,111 30,111 27.7,108.7 T1.2 | v52,111 52.32,111 52.51,110.81 71.19,110.81 v74,108
N$78
  Bottom 1.27: XLR2.3 55.74,163.74 53,161 53,116 | T2.2 27.8,102.8 30,105 42,105 53,116 | 53,116 64.9,116 70.9,122 R12.2 78.9,124.44 PAD2.1
N$79
  Top 0.406: R16.2 23.54,99 28,99 30.1,101.1 T2.3
N$80
  Top 0.406: R14.2 22.54,105 28,105 30,107 T1.3
N$81
  Top 0.254: Q2.2 33,77.4 33,73.1 U$6.P$1
  Top 0.406: R20.1 27.6,80.76 29.7,80.76 | 33.54,77.22 30,80.76
  Top 0.61: Q2.2 29.7,80.76 30,80.76 66.76,80.76 75.09,89.09
  Top 1.27: XLR2.2 XLR2.1 72.26,163.74 81,155 81,149.1 PAD1.1 79.6,146.3 C4.+ 74.94,137.94 71,134 71,117 74.71,113.29 C11.+ 74.29,113.29 71,110 71,93.18 75.09,89.09 C15.+
  Bottom 0.406: R45.1 78,33 75,36 75,43 81,49 81,74 77,78 32.4,78 Q2.2
N$82
  Top 0.406: R19.2 R18.2 21.89,95.35 T3.3
N$83  (1 unrouted)
N$84
  Bottom 0.406: R15.2 81.54,106.73 ARMED2.A
N$85
  Bottom 0.406: R12.1 81.54,121.81 ARMED1.A
N$86  (1 unrouted)
N$87  (1 unrouted)
N$88  (1 unrouted)
N$89
  Top 0.16: 23.15,223 R52.1
  Top 0.305: T5.3 arc90 23.15,223
N$90
  Top 0.16: 23.15,234 R51.1
  Top 0.305: T5.4 arc-90 23.15,234
N$95
  Top 0.254: U3.28 42.71,14.44 JP4.1
N$109  (via drill 0.4)
  other vias: 13,72
PWM0
  Top 0.406: XB2.6 20.32,175.97 JP2.6
PWR_JUNC  (via drill 0.35)
  Top 0.305: U2.3 15.56,135.44 14,137 14,138 16,140 28,140 29,139 30.45,139 C7.1 33,140.05 33,137 32.25,136.25 26.75,136.25 25.94,135.44 U2.18 | U2.14 28.16,132.84 v29,132
  Top 0.61: L1.1 25.8,144 29.05,144 C7.1
  Top 1.27: Q1.2 24.8,163.84 C1.1
  Bottom 0.305: v29,132 32.25,135.25 C7.1
  Bottom 1.27: C1.1 24.8,147.62 L1.1
RADIO_CS
  Top 0.406: XB1.17 71.22,44.26 R41.1 69.96,43 68,43 66.4,41.4 66.4,34.3 65.8,33.7 63.6,33.7 63.03,33.13 U3.5
RADIO_INT
  Top 0.406: XB1.19 73,45.08 73,43 68.11,38.11 U3.3
RESET
  Top 0.406: R43.1 64.94,37.29 61.8,37.29 | 61.8,37.29 ICSP.5 | 61.8,37.29 61.8,28.8 61,28 54.88,28 54,28 52.87,29.13 U3.9
RESET1
  Top 0.406: XB2.5 17.78,176.51 JP2.5
RTS
  Top 0.406: XB2.16 17.78,203.05 JP3.6
RXD0
  Top 0.406: U3.14 40,29.84 40,27 38,25 19.83,25 CONSOLE.1
RXD1
  Top 0.406: IC3.P$9 31,34.96 31,36 32,37 34,37 35.09,35.91 U3.16
SCK
  Top 0.406: ICSP.3 56.5,38.57 56.5,50.25 | XB1.18 70.27,50.25 56.5,50.25 | 56.5,50.25 50,50.25 | 50,50.25 IC2.6 | IC1.6 50,60.14 50,50.25
  Bottom 0.406: 46.25,50.25 IC2.6 | ICSP.3 55.41,34.92 U3.8
SCK1
  Top 0.406: XB2.18 11.51,203.83 JP3.8
SCL
  Top 0.254: 17.5,20.25 17.3,20.45 17.3,22.4 16.7,23 13,23 11.8,24.2 11.8,25.11 11.41,25.5 IC4.11 | 17.5,20.25 IC5.14 | 17.5,20.25 21.75,20.25 22.43,19.57
  Top 0.305: U3.22 27.47,11.34 R49.1 27.18,11.18 24.98,8.97 IC6.P$8 | U3.22 25.7,13 24.8,13 SCL.P$1 | U3.22 27.23,14.77 22.43,19.57 | IC5.14
SDA  (via drill 0.35)
  Top 0.254: v26,12 25.7,11.7 SDA.P$1 | IC4.12 15,26 18,23 21.78,23 U3.23 | 19.89,19.01 20.99,19.01 v22,18
  Top 0.305: U3.23 30.01,11.39 R50.1 29.04,10 27,10 24.73,7.72 IC6.P$7 | IC5.13 19.89,19.01
  Bottom 0.254: R50.1 29.28,12.42 26.12,12.42 v26,12
  Bottom 0.305: U3.23 26.78,18 v22,18
SLEEP
  Top 0.406: XB2.13 25.4,204.67 JP3.3
TEMP
  Top 0.406: U3.39 70.69,14.73
  Top 0.61: U3.39 70.65,11.2 Q5.2
TEMP2
  Top 0.61: U3.38 68.11,13.93 Q4.2
TXD0
  Top 0.406: U3.15 38,29.64 38,26.8 37.1,25.9 21.47,25.9 CONSOLE.2
TXD1
  Top 0.406: IC3.P$10 32.55,34.85 U3.17
VCC  (via drill 0.3, 0.35)
  Top 0.254: D3.2 11.11,114.89 v11,115 | 15,83 5.1,92.9 U$3.P$1
  Top 0.406: R30.2 34,62.56 34,51 34.79,50.21 R37.2
  Top 0.61: C17.1 46.07,69.15 IC1.8 | 45.9,58.1 C19.1 46.19,58.05 IC2.8 45.33,55.33 44,54 44,46 47,43 SJ1.1 | 4.34,36.11 SJ3.1 | SJ3.1 2.66,35.76 2.2,35.3 2.2,15 | 2.2,15 SJ4.1 | 6.62,12.14 SJ5.1 5.44,11.76 2.2,15 | SJ3.1 8.46,35.76 10,37.3 | 10,37.3 15,42.3 v15,73.7 15,83 15,86.4 12,89.4 12,102 13.91,103.91 13.91,109.09 C14.1 12.25,110.96 C13.1 14.44,114.89 D3.2 16.68,117 L2.2 | SJ2.1 10,37.3
  Bottom 0.254: v11,115 10,116 v7,116 3.46,119.54 R10.2
  Bottom 0.406: IC1.8 IC1.7 | IC2.8 IC2.7 | R30.2 36.66,62.7 44,62.7
  Bottom 0.61: C17.1 46.07,73.6 46.17,73.7 | SJ200.1 46.17,73.7 | 46.17,73.7 v15,73.7 14.04,73.7 | IC1.8 44,67 44,62.7 44,60 45.9,58.1 C19.1
VCC_ACCEL
  Top 0.254: IC5.7 17.37,14.99
  Top 0.305: 17.37,14.99 IC5.6 16.11,15.01 C29.1 | IC5.1 16.13,21.55 C28.1
  Top 0.61: 16.09,19.05 IC5.1 | C29.1 13.52,15.06 C30.+ 9.33,15 SJ4.2
  Bottom 0.305: C29.1 14.01,15.01 15,16 15,20.51 C28.1
VCC_ALT
  Top 0.254: C33.1 12,7.3 12,4 13,3 17,3 17,3.12 IC6.P$4
  Top 0.305: IC6.P$1 13.67,8.97 C33.1 13.77,8.77 | 18.27,5.22 IC6.P$4
  Top 0.61: 13.77,8.77 13.64,8.64 C34.+ 8.6,8.64 SJ5.2
VCC_GPS
  Top 0.61: IC3.P$1 18.91,34.99 C22.2 15.77,34.99 SJ2.2
VCC_GYRO
  Top 0.254: C26.1 8,28.88 IC4.18 IC4.17 8.5,25.96 8.71,25.75 9.21,25.75 9.5,26.04 IC4.15
  Top 0.305: SJ3.2 4,21.47 R44.1
  Top 0.61: C26.1 C25.1 7.96,34.46 C23.1 7.69,34.24 SJ3.2
VCC_MCU
  Top 0.508: 44,23.68 44,9.73
  Top 0.61: 44,23.68 U3.10 51.05,30.73 C24.1 51.67,32.67 53,34 53,37.59 ICSP.2 55.24,40.76 53,43 SJ1.2 | 44,9.73 L3.1 40.37,6.1 R50.2 R49.2
  Bottom 0.61: ICSP.2 57.81,42.4 R43.2 64.97,43.09 R41.2
VCC_XB
  Top 0.61: C16.1 C18.1 77.21,70.31 XB1.1
  Bottom 0.61: C16.1 75.86,73.7 71,73.7 70.9,73.7 SJ200.2
VREF
  Top 0.406: XB2.14 22.86,204.13 JP3.4
XTAL1
  Bottom 0.406: U3.13 42.71,32.63 Q3.2 C20.1
XTAL2
  Bottom 0.406: U3.12 45.25,33.17 Q3.1 C21.1
(copper drawn outside any net)
  shapes: Top area x15

## Text on the board
tPlace: UNBALANCED | BALANCED | CU IN SPACE 2018 | PROPERTERY OF: / CARLETON UNIVERSITY IN SPACE | REV 2.0 | SAMUEL DEWAN | COLIN ANDERSEN | ARMED 1 | CONNECT TO ARM | ARMED 2 | ARMED | CONNECT TO ARM | GND
tNames: +5V | DOUT | DIN | GND | EEPROM 2 | GPS Antenna | EEPROM 1 | +3.3V | MOSI | GND | SCK | RST | MISO | GND | TXD | RXD | Gyro | Accel | SCL | SDA | Alt
_tsilk: Q1 | C1 | C2 | XLR2 | C14 | T1 | T2 | T3 | T4 | Q2
_tNames: T1 | JP3 | JP3 | JP1 | JP1 | C1 | C1 | C2 | C2 | LM3950 | LM3950 | XB1 | XB1 | JP2 | JP2 | U1 | R1 | R2 | R3 | C3 | XLR1 | R4 | R5 | C5 | C4 | R6 | D1 | L1 | C6 | R7 | C7 | C9 | C8 | R8 | U2 | R9 | C10 | R10 | D2 | C11 | R11 | C12 | R12 | L2 | R13 | D3 | ARMED1 | C13 | R14 | R15 | ARMED2 | R16 | C15 | R17 | R18 | R19 | R21 | R20 | R22 | R24 | R23 | C16 | R25 | C17 | C18 | R26 | XB1 | R27 | R30 | R28 | R29 | R32 | R33 | R31 | R34 | C19 | R35 | R36 | R37 | R38 | R39 | R40 | SJ1 | R41 | R42 | C22 | R43 | SJ2 | C24 | SJ3 | C20 | C21 | ICSP | Q3 | IC3 | C23 | DEBUG | C25 | C27 | C26 | CONSOLE | C28 | C30 | C29 | R44 | R45 | SJ4 | U3 | SJ5 | C32 | C33 | R46 | C34 | C36 | R49 | R50 | C31 | R48 | L3 | R47 | C35 | C37
_bNames: SJ200
201bmp: C:/Users/Colin/Desktop/inspacetest.bmp